# Altium PCB SmartIMU_TestBoard_Pcb.PcbDoc
Units mil, origin at the board's own origin, x right, y up, seen from the top; angles counter-clockwise.
Board outline 1200 x 1025 mil, 2 copper layers (Top Layer, Bottom Layer), stack 12.8 mil thick; 61 components, 28 nets, 141 pads, 20 vias.
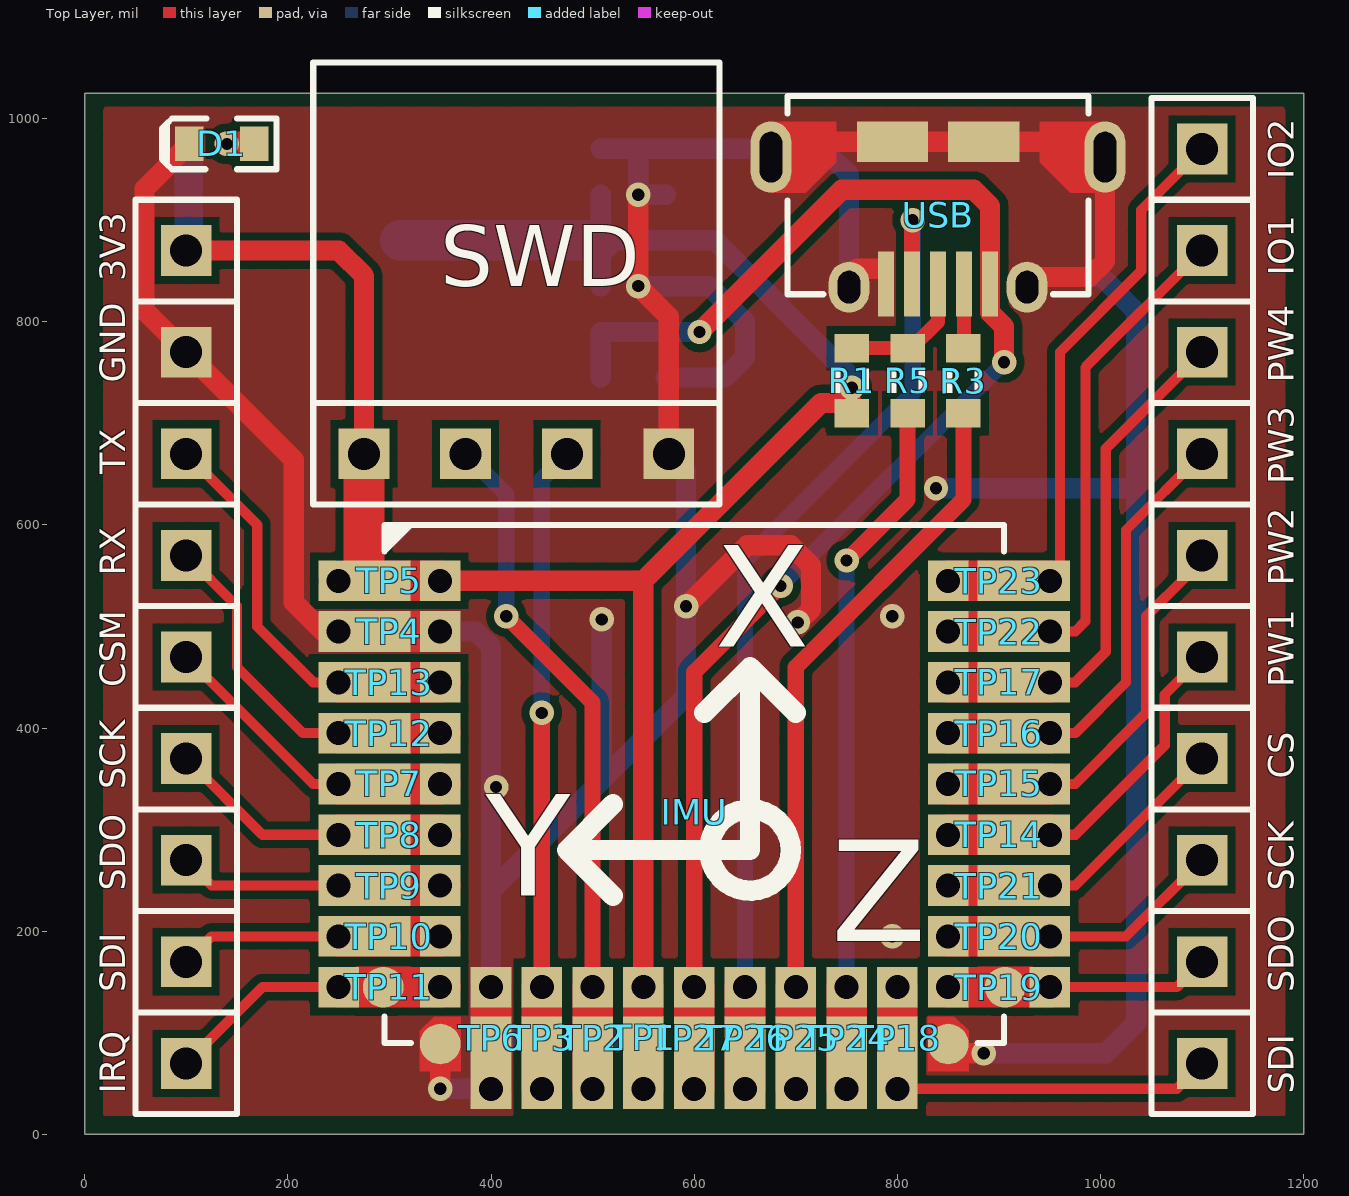
[diagram p0: Top Layer view]
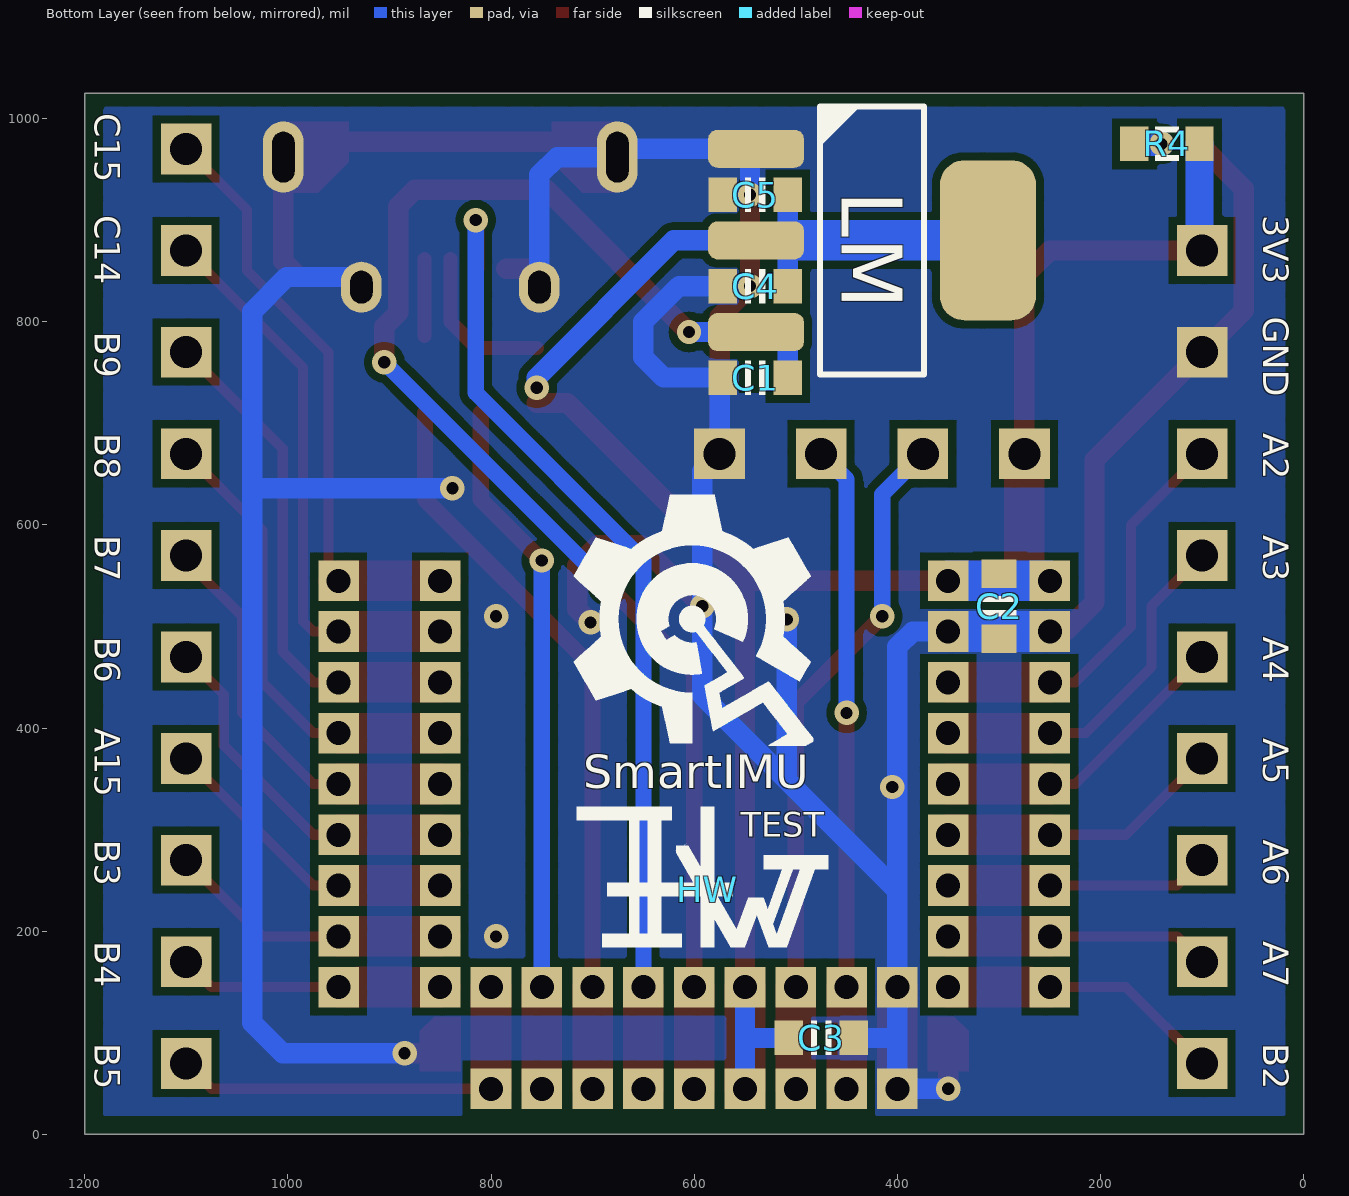
[diagram p1: Bottom Layer view, seen from below]

## Layer stack, top to bottom
Top Solder: solder mask 0.4, Solder Resist, Dk 3.5
Top Layer: signal copper 1.4
Dielectric1: core 10, Dk 4.2
Bottom Layer: signal copper 1.4
Bottom Solder: solder mask 0.4, Solder Resist, Dk 3.5

## Board outline
0,0 1200,0 1200,1025 0,1025

## Design rules (kind name [scope] priority, off if disabled: settings)
Clearance ClearancePolygon [InPolygon] p1: gap=8
Clearance [All] p2: gap=6
ComponentClearance [All] p1: gap=0 collisioncheckmode=3 verticalgap=0 showdistances=FALSE
HoleToHoleClearance [All] p1: gap=6 allowstackedmicrovias=TRUE
MinimumSolderMaskSliver [All] p1: minsoldermaskwidth=5
PlaneConnect [All] p1: planeconnectstyle=Direct reliefexpansion=20 reliefentries=4 reliefconductorwidth=10 reliefairgap=10
PolygonConnect [All] p1: connectstyle=Direct reliefconductorwidth=10 reliefentries=4 polygonreliefangle="90 Angle" airgapwidth=10
RoutingVias [All] p1: holewidth=12 width=20 viastyle="Through Hole" minholewidth=12 minwidth=20 maxholewidth=28 maxwidth=50
SilkToSilkClearance [All] p1: silktosilkclearance=0
SilkToSolderMaskClearance [IsPad] p1: minsilkscreentomaskgap=1.5 clearancetoexposedcopper=TRUE
SolderMaskExpansion [All] p1: expansion=0
UnConnectedPin [All] p1 off:
Width [All] p1: maxlimit=40 minlimit=6 preferedwidth=10
23 further rules are at their usual default settings.

## Components (designator, comment, footprint, x,y, rotation, side; value= is the part's Value field where it differs from the comment)
3V3 "HDR1X1_180_2.54" HDR1X1_180_2.54 100,870 r0 top locked
C1 "Cap_0603" CAP_0603 540,745 r0 bottom locked
C2 "Cap_0603" CAP_0603 300,520 r90 bottom
C3 "Cap_0603" CAP_0603 475,95 r0 bottom
C4 "Cap_0603" CAP_0603 540,835 r180 bottom locked
C5 "Cap_0603" CAP_0603 540,925 r180 bottom locked
CS "HDR1X1_180_2.54" HDR1X1_180_2.54 1100,370 r0 top locked (schematic designator EX.CS)
CSM "HDR1X1_180_2.54" HDR1X1_180_2.54 100,470 r0 top locked
D1 "LED_0603_BLUE" LED_0603_BLUE 135,975 r180 top locked
GND "HDR1X1_180_2.54" HDR1X1_180_2.54 100,770 r90 top locked
HW "HW" Logo_HW_v2.0 587,241 r180 bottom
IMU "SmartIMU_Full" SMART_IMU_FULL 260,55 r0 top locked
IO1 "HDR1X1_180_2.54" HDR1X1_180_2.54 1100,870 r0 top locked (schematic designator EX.IO1)
IO2 "HDR1X1_180_2.54" HDR1X1_180_2.54 1100,970 r0 top locked (schematic designator EX.IO2)
IRQ "HDR1X1_180_2.54" HDR1X1_180_2.54 100,70 r0 top locked
LM "LM1117" SOT223 425,880 r270 bottom locked
PW1 "HDR1X1_180_2.54" HDR1X1_180_2.54 1100,470 r90 top locked
PW2 "HDR1X1_180_2.54" HDR1X1_180_2.54 1100,570 r90 top locked
PW3 "HDR1X1_180_2.54" HDR1X1_180_2.54 1100,670 r90 top locked
PW4 "HDR1X1_180_2.54" HDR1X1_180_2.54 1100,770 r90 top locked
R1 "Res_0603" RES_0603 755,742 r270 top
R3 "Res_0603" RES_0603 865,742 r270 top
R4 "Res_0603" RES_0603 134.69,975 r180 bottom
R5 "Res_0603" RES_0603 810,742 r270 top
RX "HDR1X1_180_2.54" HDR1X1_180_2.54 100,570 r0 top locked
SCK "HDR1X1_180_2.54" HDR1X1_180_2.54 1100,270 r90 top locked (schematic designator EX.SCK)
SCK "HDR1X1_180_2.54" HDR1X1_180_2.54 100,370 r0 top locked
SDI "HDR1X1_180_2.54" HDR1X1_180_2.54 1100,70 r90 top locked (schematic designator EX.SDI)
SDI "HDR1X1_180_2.54" HDR1X1_180_2.54 100,170 r0 top locked
SDO "HDR1X1_180_2.54" HDR1X1_180_2.54 1100,170 r90 top locked (schematic designator EX.SDO)
SDO "HDR1X1_180_2.54" HDR1X1_180_2.54 100,270 r0 top locked
SWD "HDR1X4_90F_2.54" HDR1X4_90F_2.54 275,670 r0 top locked
TP1 "TestPoint_HalfH" TestPoint_0.6mm_HelfH 550,45 r90 top locked
TP2 "TestPoint_HalfH" TestPoint_0.6mm_HelfH 500,45 r90 top locked
TP3 "TestPoint_HalfH" TestPoint_0.6mm_HelfH 450,45 r90 top locked
TP4 "TestPoint_HalfH" TestPoint_0.6mm_HelfH 250,495 r0 top locked
TP5 "TestPoint_HalfH" TestPoint_0.6mm_HelfH 250,545 r0 top locked
TP6 "TestPoint_HalfH" TestPoint_0.6mm_HelfH 400,45 r90 top locked
TP7 "TestPoint_HalfH" TestPoint_0.6mm_HelfH 250,345 r0 top
TP8 "TestPoint_HalfH" TestPoint_0.6mm_HelfH 250,295 r0 top
TP9 "TestPoint_HalfH" TestPoint_0.6mm_HelfH 250,245 r0 top
TP10 "TestPoint_HalfH" TestPoint_0.6mm_HelfH 250,195 r0 top
TP11 "TestPoint_HalfH" TestPoint_0.6mm_HelfH 250,145 r0 top
TP12 "TestPoint_HalfH" TestPoint_0.6mm_HelfH 250,395 r0 top
TP13 "TestPoint_HalfH" TestPoint_0.6mm_HelfH 250,445 r0 top
TP14 "TestPoint_HalfH" TestPoint_0.6mm_HelfH 950,295 r180 top locked
TP15 "TestPoint_HalfH" TestPoint_0.6mm_HelfH 950,345 r180 top locked
TP16 "TestPoint_HalfH" TestPoint_0.6mm_HelfH 950,395 r180 top locked
TP17 "TestPoint_HalfH" TestPoint_0.6mm_HelfH 950,445 r180 top locked
TP18 "TestPoint_HalfH" TestPoint_0.6mm_HelfH 800,45 r90 top locked
TP19 "TestPoint_HalfH" TestPoint_0.6mm_HelfH 950,145 r180 top locked
TP20 "TestPoint_HalfH" TestPoint_0.6mm_HelfH 950,195 r180 top locked
TP21 "TestPoint_HalfH" TestPoint_0.6mm_HelfH 950,245 r180 top locked
TP22 "TestPoint_HalfH" TestPoint_0.6mm_HelfH 950,495 r180 top locked
TP23 "TestPoint_HalfH" TestPoint_0.6mm_HelfH 950,545 r180 top locked
TP24 "TestPoint_HalfH" TestPoint_0.6mm_HelfH 750,45 r90 top locked
TP25 "TestPoint_HalfH" TestPoint_0.6mm_HelfH 700,45 r90 top locked
TP26 "TestPoint_HalfH" TestPoint_0.6mm_HelfH 650,45 r90 top locked
TP27 "TestPoint_HalfH" TestPoint_0.6mm_HelfH 600,45 r90 top locked
TX "HDR1X1_180_2.54" HDR1X1_180_2.54 100,670 r0 top locked
USB "USB_Micro" USB_Micro-AB 840,962 r0 top locked

## Footprints (in the part's own frame and the unit in brackets; to place one, negate y for a bottom-side part, rotate by r counter-clockwise, add the part's x,y. Pads: shape width x height; smd on the part's side, far side on the other; paste and mask are expansions set on the pad)
CAP_0603 [mil]
  rect 28x34 smd: 1(-32,0) 2(32,0)
  Top Layer pour cut-out: -18,17 18,17 18,-17 -18,-17
  silkscreen extent -10,-17 10,17, body extent -31,-16 31,16, height 36
HDR1X1_180_2.54 [mm] "Connector; Header; 2 Position"
  rect 1.27x1.27 hole 0.8: 1(0,0)
  silkscreen extent -1.27,-1.27 1.27,1.27, body extent -1.27,-1.27 1.27,1.27, height 7.58
HDR1X4_90F_2.54 [mm] "Connector; Header; 2 Position"
  rect 1.27x1.27 hole 0.8: 1(0,0) 2(2.54,0) 3(5.08,0) 4(7.62,0)
  silkscreen extent -1.27,-1.27 8.89,9.78, body extent -1.39,-0.16 9.02,9.9, height 2.52
LED_0603_BLUE [mil]
  rect 28x34 smd: 1(-32,0) 2(32,0)
  Top Layer pour cut-out: -18,17 18,17 18,-17 -18,-17
  silkscreen extent -54,-25 59,25, body extent -31,-16 32,16, height 30
Logo_HW_v2.0 [mil]
  silkscreen extent -129,-57 119,82
RES_0603 [mil]
  rect 28x34 smd: 1(-32,0) 2(32,0)
  Top Layer pour cut-out: -18,17 18,17 18,-17 -18,-17
  silkscreen extent -12,-17 12,17, body extent -31,-16 32,16, height 20
SMART_IMU_FULL [mil]
  rect 54x40 smd mask+1: 1(34,490) 2(34,440) 3(34,390) 4(34,340) 5(34,290) 6(34,240) 7(34,190) 8(34,140) 18(646,140) 19(646,190) 20(646,240) 21(646,290) 22(646,340) 23(646,390) 24(646,440) 25(646,490)
  rect 40x54 smd mask+1: 1(290,34) 2(140,34) 10(190,34) 11(240,34) 12(340,34) 13(390,34) 14(440,34) 15(490,34) 16(540,34)
  round 40 smd mask+0: 2(90,34) 2(590,34) 9(34,90) 17(646,90)
  Top Layer region: 610,7 610,47 596,61 570,61 570,7
  Top Layer region: 110,7 110,61 84,61 70,47 70,7
  Top Layer region: 7,70 47,70 61,84 61,110 7,110
  Top Layer region: 673,110 619,110 619,84 633,70 673,70
  silkscreen extent 35,35 645,545, body extent 40,40 640,540, height 84
SOT223 [mm] "SOT223, 4-Leads, Body 6.7x7.3mm (max), Pitch 2.29mm, IPC Medium Density"
  rrect50% 0.95x2.4 smd: 1(-2.29,-2.9) 2(0,-2.9) 3(2.29,-2.9)
  rrect50% 4x2.4 smd: 4(0,2.9)
  silkscreen extent -3.35,-1.3 3.35,1.3, body extent -3.35,-3.65 3.35,3.65, height 1.8
TestPoint_0.6mm_HelfH [mil]
  rect 40x40 hole 23.62: 1(0,0) 1(100,0)
  body extent -50,-50 50,50, height 192
USB_Micro-AB [mil]
  rect 15.75x64 smd: 1(51.18,-125) 2(25.59,-125) 3(0,-125) 4(-25.59,-125) 5(-51.18,-125)
  oval 40x70 hole 22 slot 50 at 90 deg mask+0: 5(-164.37,0) 5(164.37,0)
  oval 40x50 hole 22 slot 32 at 90 deg mask+0: 5(-87.6,-128) 5(87.6,-128)
  rect 70x40 smd mask+0: 5(-45,15) 5(45,15)
  Top Layer region: 100,35 164.37,35 164.37,-35 130,-35 100,-5
  Top Layer region: -164.37,35 -100,35 -100,-5 -130,-35 -164.37,-35
  silkscreen extent -148,-135 148,60, body extent -157,-138 157,75, height 107

## Part data
3V3 CS CSM GND IO1 IO2 IRQ PW1 PW2 PW3 PW4 RX SCK SCK SDI SDI SDO SDO SWD TX: "Header"
C1 C2 C3 C4 C5: "Capacitor"
D1: "LED"
HW: "Logo"
IMU: "Module"
LM: "Power"
R1 R3 R4 R5: "Resistor"
TP1 TP2 TP3 TP4 TP5 TP6 TP7 TP8 TP9 TP10 TP11 TP12 TP13 TP14 TP15 TP16 TP17 TP18 TP19 TP20 TP21 TP22 TP23 TP24 TP25 TP26 TP27: "TestPoint"
USB: "USB"

## Via types
v1: diameter 24, hole 12, Top Layer to Bottom Layer, 20 vias

## Nets (pads, with @x,y where several pads share a name; then routed paths per layer and width w, separated by ;. In a path a pad name is that pad's centre, name@x,y a point inside that pad or via, vN(x,y) a via of type N, cw(c..) or ccw(c..) an arc to the next point about the centre after c; other vN are vias at no path point)
3V3: 3V3.1 C2.2 C3.2 C4.2 C5.2 IMU.1 LM.2 LM.4 R1.2 R4.2 SWD.1 TP1.1 TP5.1 | length 2512
  Top Layer w20: 3V3.1@112,870 3V3.1 250,870 275,845 SWD.1 SWD.1@262,670 ; IMU.1@275,545 IMU.1@294,545 ; TP5.1@350,545 550,545 ; TP1.1@550,145 550,545 ; R1.2@755,720 725,720 550,545
  Top Layer w40: IMU.1@275,545 SWD.1 ; IMU.1@294,545 TP5.1@350,545 ; TP1.1@550,45 TP1.1@550,145
  Bottom Layer w20: R4.2@100,972.32 R4.2 ; C3.2 550,95 ; C4.2 LM.2@508,880 ; C5.2 LM.2@508,880 ; TP1.1@550,45 550,95 ; TP1.1@550,145 550,95 ; v1(755,735) 755,745 620,880 LM.2 LM.2@508,880
  Bottom Layer w28: 3V3.1@102.69,872.69 R4.2
  Bottom Layer w40: TP5.1@250,545 TP5.1@350,545 ; LM.4 LM.2@508,880
CSM: CSM.1 IMU.5 TP7.1 | length 301.8
  Top Layer w10: CSM.1 225,345 TP7.1@250,345
  Top Layer w40: TP7.1@250,345 TP7.1@350,345
EX.CS: CS.1 IMU.19 TP21.1 | length 301.8
  Top Layer w10: TP21.1@950,245 975,245 CS.1
  Top Layer w40: TP21.1@850,245 TP21.1@950,245
EX.IO1: IMU.24 IO1.1 TP22.1 | length 551.8
  Top Layer w10: TP22.1@950,495 975,495 985,505 985,755 IO1.1
  Top Layer w40: TP22.1@850,495 TP22.1@950,495
EX.IO2: IMU.25 IO2.1 TP23.1 | length 587.1
  Top Layer w10: TP23.1@950,545 960,555 960,770 1040,850 1040,910 IO2.1
  Top Layer w40: TP23.1@850,545 TP23.1@950,545
EX.SCK: IMU.18 SCK.1@1100,270 TP20.1 | length 281.1
  Top Layer w10: TP20.1@950,195 1025,195 SCK.1@1100,270
  Top Layer w40: TP20.1@850,195 TP20.1@950,195
EX.SDI: IMU.16 SDI.1@1100,70 TP18.1 | length 410.4
  Top Layer w10: TP18.1@800,45 1075,45 SDI.1@1100,70
  Top Layer w40: TP18.1@800,45 TP18.1@800,145
EX.SDO: IMU.17 SDO.1@1100,170 TP19.1 | length 260.4
  Top Layer w10: TP19.1@950,145 1075,145 SDO.1@1100,170
  Top Layer w40: TP19.1@850,145 TP19.1@950,145
GND: C1.2 C2.1 C3.1 C4.1 C5.1 D1.2 GND.1 IMU.2 LM.1 SWD.4 TP4.1 TP6.1 USB.5 | length 5167.6
  Top Layer w20: D1.2 59,931 59,811 GND.1 206,664 206,524 235,495 250,495 IMU.2@294,495 ; v1(350,45) 350,89 IMU.2@360,99 ; v1(545,925) v1(545,835) 575,805 SWD.4 ; v1(592,520) 652,580 695,580 715,560 715,517 v1(702,504) ; USB.5@675.63,962 690.63,977 795,977 885,977 989.37,977 1004.37,962 1004.37,859.37 989,844 USB.5@927.6,844 ; USB.5@760.4,852 USB.5@785,852 ; IMU.2@859,80 v1(885,80)
  Top Layer w40: IMU.2@294,495 TP4.1@350,495 ; TP6.1@400,45 400,89 TP6.1@400,145
  Bottom Layer w20: v1(350,45) 400,45 400,95 ; TP4.1@350,495 385,495 400,480 400,240 ; C3.1 400,95 ; LM.1@508,970.16 LM.1 USB.5@667.47,970.16 ; 509,350 v1(509,507) ; v1(545,835) C4.1 615,835 650,800 650,765 630,745 C1.2 ; LM.1@545,964.33 v1(545,925) C5.1 ; C1.2@575,742 SWD.4 592,653 v1(592,520) 592,432 400,240 ; USB.5@675.63,962 735,962 752.4,944.6 USB.5@752.4,844 ; v1(838,636) 1034,636 ; v1(885,80) 1005,80 1035,110 1035,810 1001,844 USB.5@927.6,844 ; 400,95 400,145 400,240
  Bottom Layer w40: TP4.1@250,495 TP4.1@350,495
  other v1: 795,195 405,342 795,510
IRQ: IMU.9 IRQ.1 TP11.1 | length 281.1
  Top Layer w10: IRQ.1 175,145 TP11.1@250,145
  Top Layer w40: TP11.1@250,145 TP11.1@350,145
NetD1_1: D1.1 R4.1 | length 53.7
  Top Layer w24: v1(140,975) D1.1
  Bottom Layer w24: v1(140,975) R4.1
NetR1_1: R1.1 R5.1 USB.3 | length 157.5
  Top Layer w14: R1.1 814,774 840,800 USB.3@840,861.69
NetR3_1: R3.1 USB.2 | length 75.6
  Top Layer w14: R3.1@865.59,786.06 USB.2@865.59,861.69
PWM1: IMU.20 PW1.1 TP14.1 | length 351.8
  Top Layer w10: TP14.1@950,295 975,295 1063.13,383.13 1063.13,433.13 PW1.1
  Top Layer w40: TP14.1@850,295 TP14.1@950,295
PWM2: IMU.21 PW2.1 TP15.1 | length 375.6
  Top Layer w10: TP15.1@950,345 975,345 1045,415 1045,510 PW2.1@1085,550
  Top Layer w40: TP15.1@850,345 TP15.1@950,345
PWM3: IMU.22 PW3.1 TP16.1 | length 451.8
  Top Layer w10: TP16.1@950,395 975,395 1025,445 1025,595 PW3.1
  Top Layer w40: TP16.1@850,395 TP16.1@950,395
PWM4: IMU.23 PW4.1 TP17.1 | length 501.8
  Top Layer w10: TP17.1@950,445 975,445 1005,475 1005,675 PW4.1
  Top Layer w40: TP17.1@850,445 TP17.1@950,445
RX: IMU.4 RX.1 TP12.1 | length 357.6
  Top Layer w10: RX.1 150,520 150,460 215,395 TP12.1@250,395
  Top Layer w40: TP12.1@250,395 TP12.1@350,395
SCK: IMU.6 SCK.1@100,370 TP8.1 | length 281.1
  Top Layer w10: SCK.1@100,370 175,295 TP8.1@250,295
  Top Layer w40: TP8.1@250,295 TP8.1@350,295
SDI: IMU.8 SDI.1@100,170 TP10.1 | length 260.4
  Top Layer w10: SDI.1@100,170 125,195 TP10.1@250,195
  Top Layer w40: TP10.1@250,195 TP10.1@350,195
SDO: IMU.7 SDO.1@100,270 TP9.1 | length 260.4
  Top Layer w10: SDO.1@100,270 125,245 TP9.1@250,245
  Top Layer w40: TP9.1@250,245 TP9.1@350,245
SWC: IMU.10 SWD.3 TP3.1 | length 635.4
  Top Layer w16: TP3.1@450,145 v1(450,415)
  Top Layer w40: TP3.1@450,45 TP3.1@450,145
  Bottom Layer w16: v1(450,415) 450,645 SWD.3
SWD: IMU.11 SWD.2 TP2.1 | length 676.8
  Top Layer w16: v1(415,510) 500,425 TP2.1@500,145
  Top Layer w40: TP2.1@500,45 TP2.1@500,145
  Bottom Layer w16: SWD.2 415,630 v1(415,510)
TX: IMU.3 TP13.1 TX.1 | length 401.8
  Top Layer w10: TX.1 170,600 170,500 225,445 TP13.1@250,445
  Top Layer w40: TP13.1@250,445 IMU.3 TP13.1@350,445
USB_DM: IMU.14 R3.2 TP25.1 | length 733.3
  Top Layer w16: TP25.1@700,145 700,460 865,625 R3.2
  Top Layer w40: TP25.1@700,45 TP25.1@700,145
USB_DP: IMU.15 R5.2 TP24.1 | length 689.9
  Top Layer w16: v1(750,565) 810,625 R5.2
  Top Layer w40: TP24.1@750,45 TP24.1@750,145
  Bottom Layer w16: TP24.1@750,145 v1(750,565)
USB_ID: IMU.13 TP26.1 USB.4 | length 970.8
  Top Layer w16: USB.4@814.41,852 v1@814.41,899.41
  Top Layer w40: TP26.1@650,45 TP26.1@650,145
  Bottom Layer w16: TP26.1@650,145 650,565 815,730 v1(815,900)
USB_VB: C1.1 IMU.12 LM.3 TP27.1 USB.1 | length 1493.7
  Top Layer w16: TP27.1@600,145 600,455 v1(685,540)
  Top Layer w20: v1(605.16,789.84) 745.32,930 875,930 891.18,913.82 891.18,808.82 905,795 v1(905,760)
  Top Layer w40: TP27.1@600,45 TP27.1@600,145
  Bottom Layer w16: v1(685,540) v1(905,760)
  Bottom Layer w20: C1.1 508,789.84 LM.3 v1(605.16,789.84)

## Polygon pours and split planes (outlines as drawn)
GND on Top Layer "Top Layer" (hatched 90Degree grid 2 track 4, remove dead copper): 20,1010 1180,1010 1180,20 20,20
GND on Bottom Layer "Top Layer" (hatched 90Degree grid 2 track 4, remove dead copper, pour order 8): 20,1010 1180,1010 1180,20 20,20

## Silkscreen, mask and mechanical layers (free items; w line width, h text height)
Top Overlay:
  circle w20: c655,280 r40
  lines w20: 520,235 475,280 ; 520,325 475,280 ; 610,415 655,460 ; 700,415 655,460 ; 475,280 655,280 655,460
  text "X" at 620,480 h100
  text "Y" at 395,235 h100
  text "Z" at 735,190 h100
Bottom Overlay:
  drawing of 3067 lines, arcs and shapes, not listed
  text "C15" at 1190,1005 h25 r90
  text "3V3" at 40,905 h25 r90
  text "C14" at 1190,905 h25 r90
  text "GND" at 40,805 h25 r90
  text "B9" at 1190,790 h25 r90
  text "A2" at 40,690 h25 r90
  text "B8" at 1190,690 h25 r90
  text "A3" at 40,590 h25 r90
  text "B7" at 1190,590 h25 r90
  text "A4" at 40,490 h25 r90
  text "B6" at 1190,490 h25 r90
  text "A15" at 1190,400 h25 r90
  text "A5" at 40,390 h25 r90
  text "SmartIMU" at 709,341 h33
  text "TEST" at 554,293 h24
  text "A6" at 40,290 h25 r90
  text "B3" at 1190,290 h25 r90
  text "A7" at 40,190 h25 r90
  text "B4" at 1190,190 h25 r90
  text "B2" at 40,90 h25 r90
  text "B5" at 1190,90 h25 r90
Mechanical 1:
  the board outline again, w2

## Dimensions
0,1025 to 1200,1025 on Mechanical 1
1200,1025 to 1200,0 on Mechanical 1